# Altium PCB E17-03-VCU.PcbDoc
Units mm, origin at the board's own origin, x right, y up, seen from the top; angles counter-clockwise.
Board outline 53.5 x 98.5 mm, 2 copper layers (Top Layer, Bottom Layer), stack 1.671 mm thick; 47 components, 26 nets, 196 pads, 89 vias.
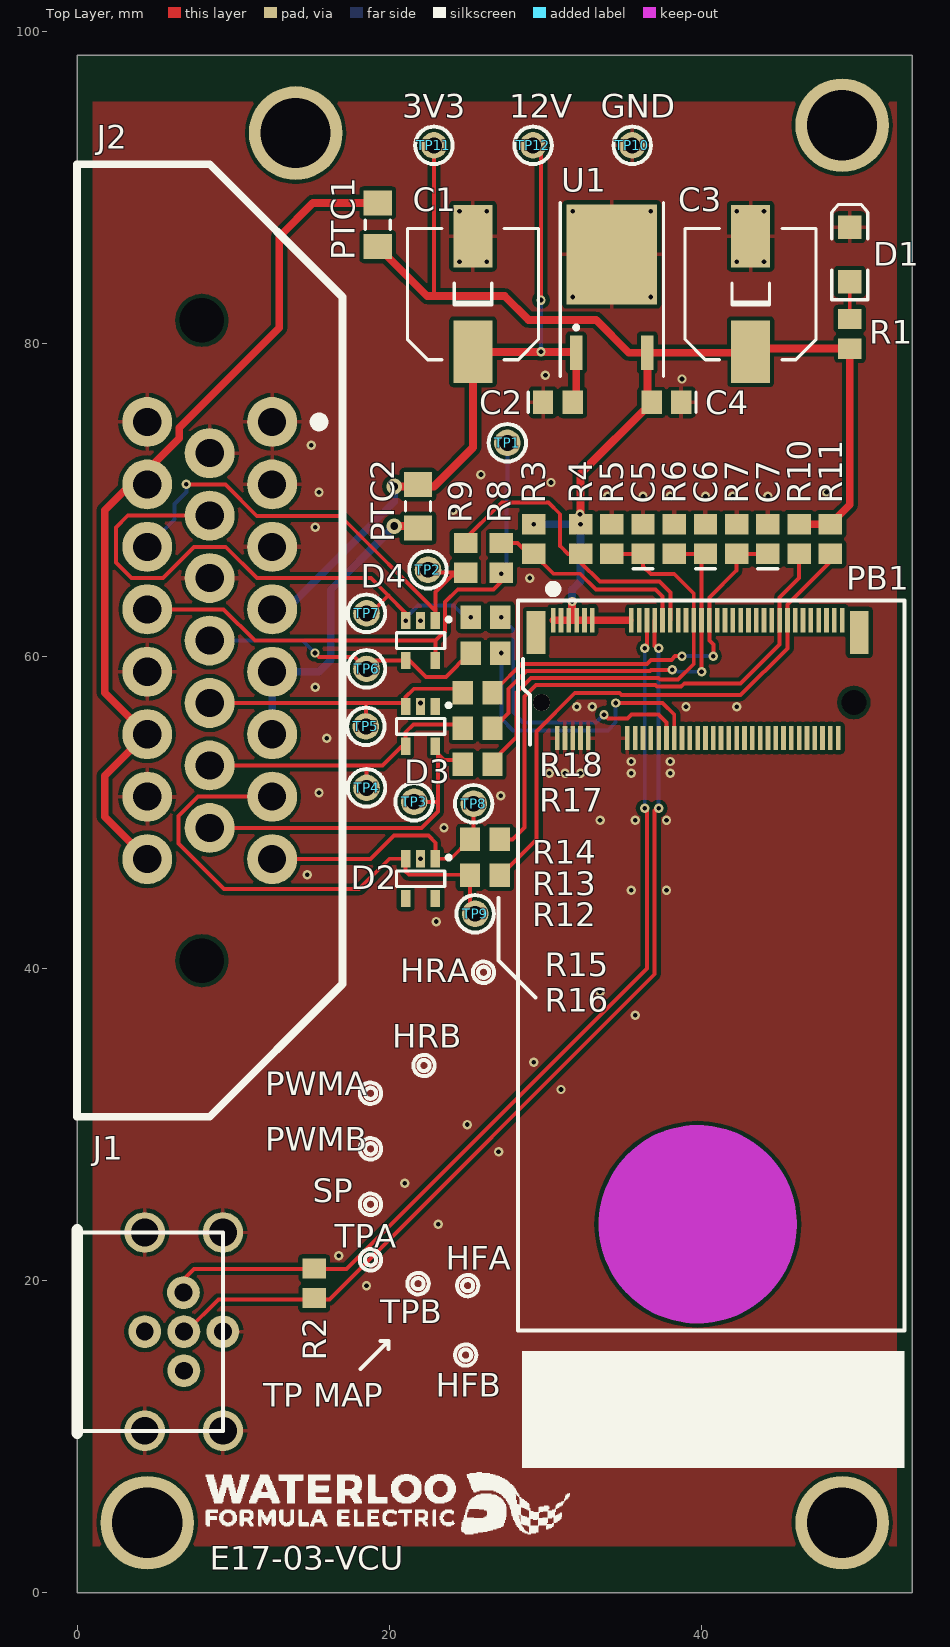
[diagram p0: Top Layer view]
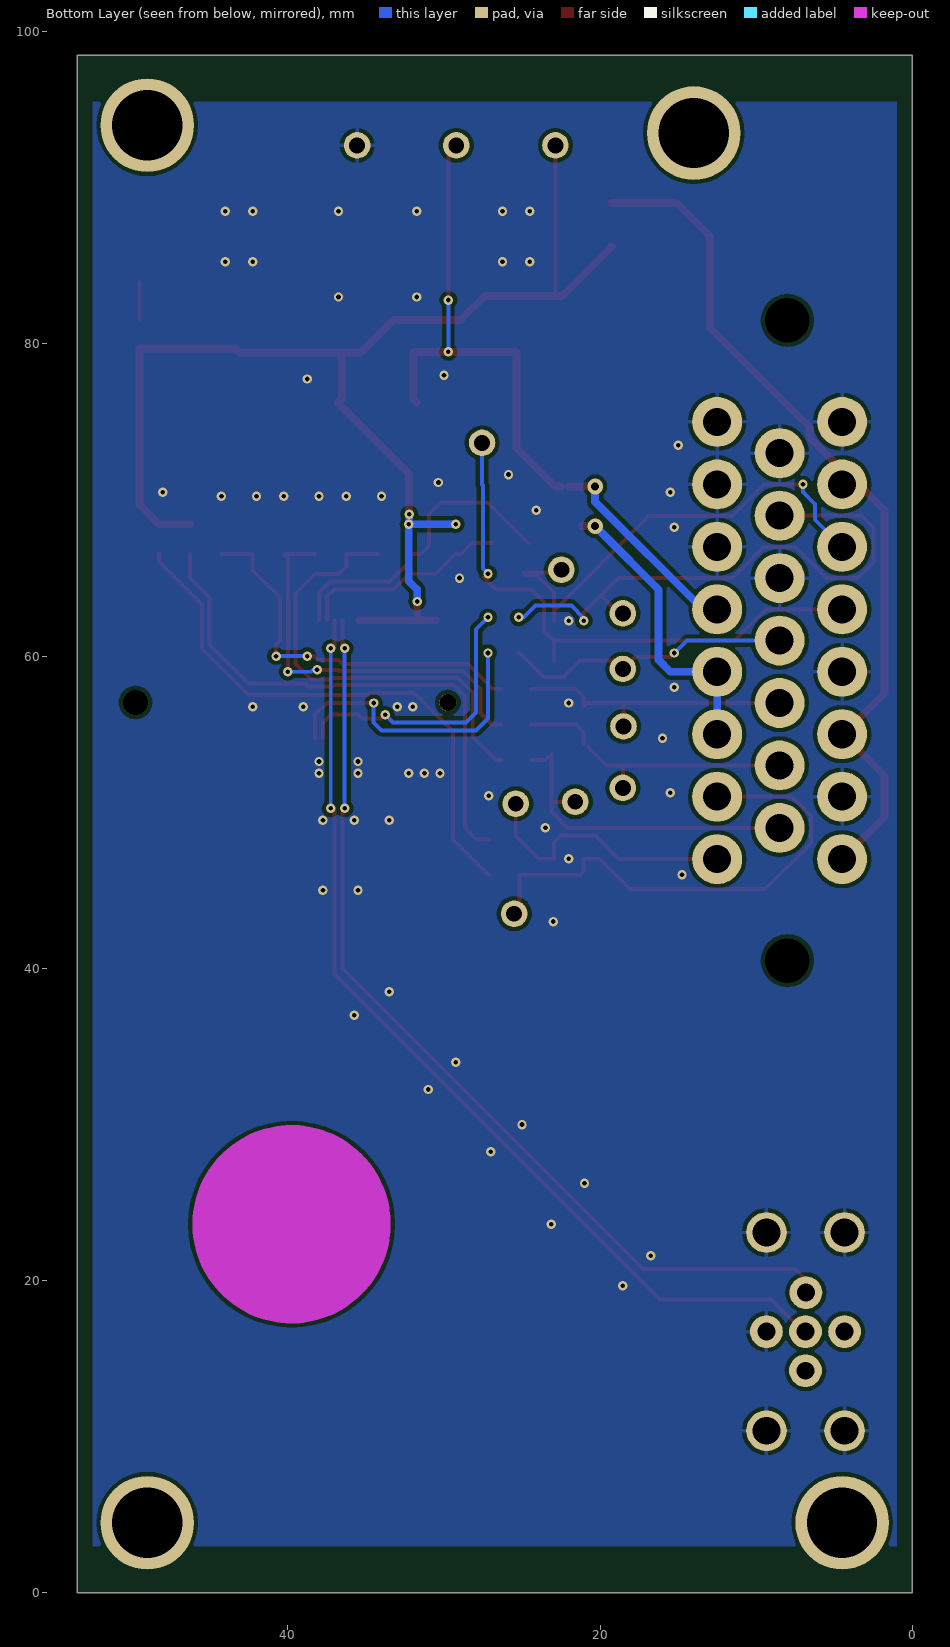
[diagram p1: Bottom Layer view, seen from below]
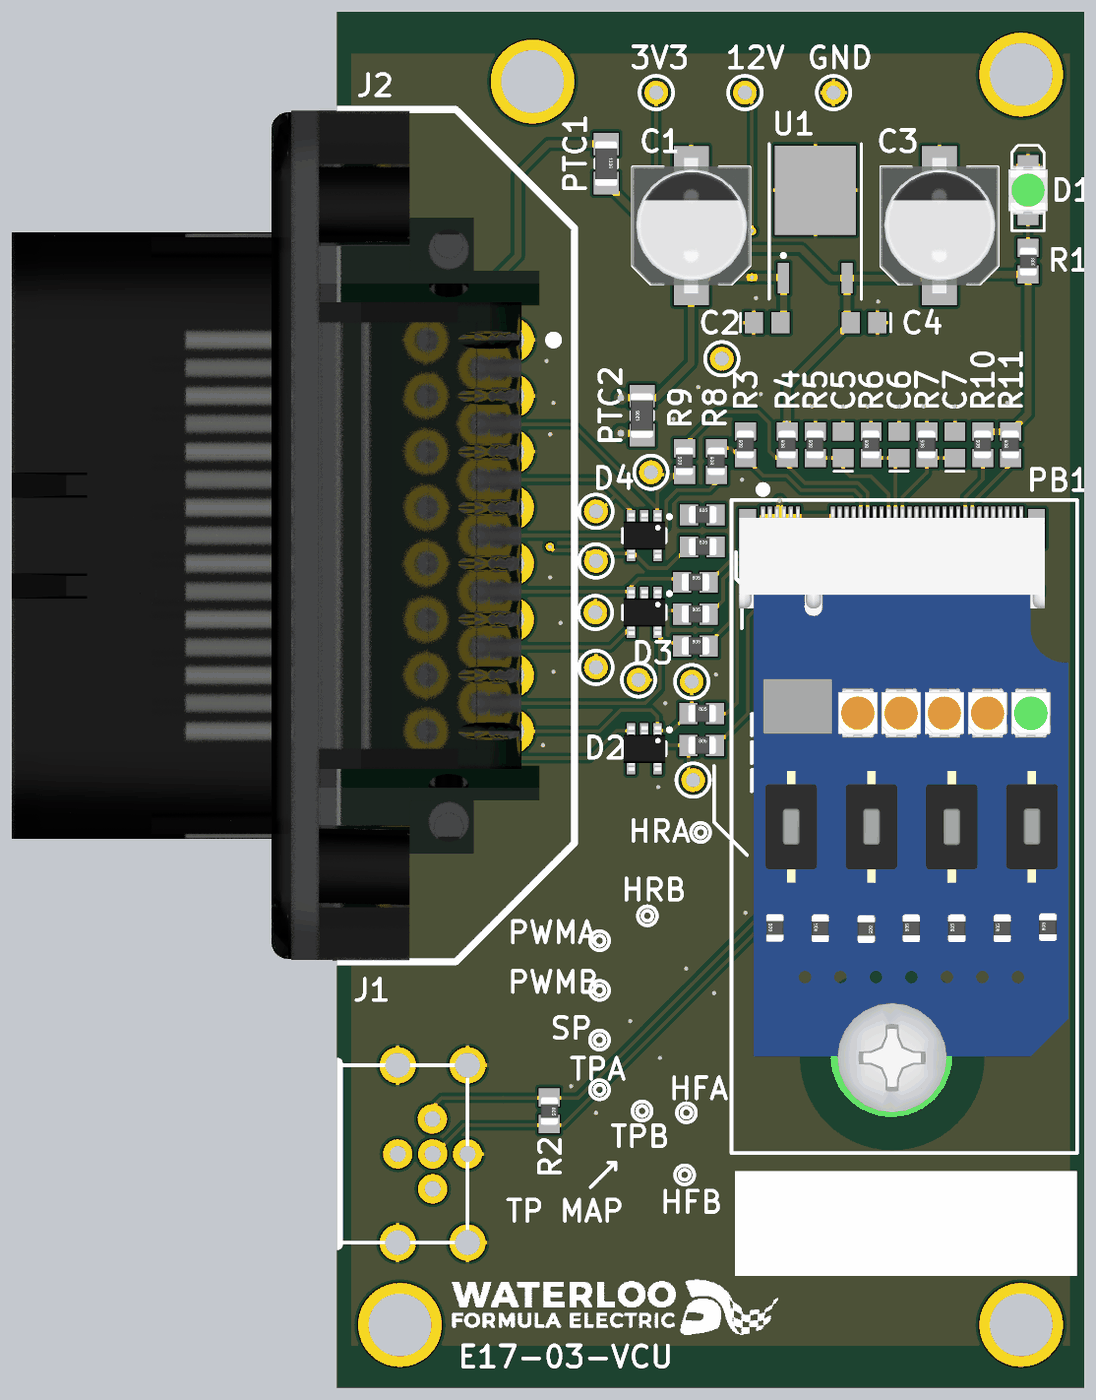
[diagram p2: 3D render of the assembled board from above, using the file's embedded part models]

## Layer stack, top to bottom
Top Solder: solder mask 0.0102, Solder Resist, Dk 3.5
Top Layer: signal copper 0.0356
Dielectric 1: dielectric 1.6, FR-4, Dk 4.8
Bottom Layer: signal copper 0.0356
Bottom Solder: solder mask 0.0102, Solder Resist, Dk 3.5

## Board outline
0,0 0,98.5 53.5,98.5 53.5,0

## Design rules (kind name [scope] priority, off if disabled: settings)
Clearance Clearance_1 [All vs InPolygon] p1: gap=0.256 ignorepadtopadclearanceinfootprint=FALSE except(0: Arc-Hole Track-Hole SMDPad-Hole THPad-Hole Via-Hole Fill-Hole Poly-Hole Region-Hole Text-Hole)
Clearance [All] p2: gap=0.2 ignorepadtopadclearanceinfootprint=TRUE except(0: Arc-Hole Track-Hole SMDPad-Hole THPad-Hole Via-Hole Fill-Hole Poly-Hole Region-Hole Text-Hole)
Height [All] p1 off: minheight=0 maxheight=25.4 prefheight=12.7
HoleSize [All] p1: absolutevalues=TRUE maxlimit=10 minlimit=0.25 maxpercent=80.000 minpercent=20.000
MinimumSolderMaskSliver [All] p1 off: minsoldermaskwidth=0.254
PlaneClearance PlaneClearance_1 [All] p1: clearance=0.2
PlaneClearance [All] p2: clearance=0.256
PlaneConnect [All] p1: planeconnectstyle=Direct reliefexpansion=0.508 reliefentries=4 reliefconductorwidth=0.254 reliefairgap=0.254
PolygonConnect [All vs IsVia] p1: connectstyle=Direct reliefconductorwidth=0.254 reliefentries=4 polygonreliefangle="90 Angle" airgapwidth=0.254
PolygonConnect PolygonConnect_1 [All] p2: thpad.connectstyle=Relief thpad.reliefconductorwidth=0.254 thpad.reliefentries=4 thpad.polygonreliefangle="90 Angle" thpad.airgapwidth=0.254 smdpad.connectstyle=Relief smdpad.reliefconductorwidth=0.254 smdpad.reliefentries=4 smdpad.polygonreliefangle="90 Angle" smdpad.airgapwidth=0.254 via.connectstyle=Direct via.reliefconductorwidth=0.254 via.reliefentries=4 via.polygonreliefangle="90 Angle" via.airgapwidth=0.254
RoutingVias [All] p1: holewidth=0.3 width=0.6 viastyle="Through Hole" minholewidth=0.25 minwidth=0.6 maxholewidth=1 maxwidth=1.27
SilkToSilkClearance [All] p1 off: silktosilkclearance=0.254
SilkToSolderMaskClearance [IsPad] p1 off: minsilkscreentomaskgap=0.1 clearancetoexposedcopper=TRUE
SolderMaskExpansion [All] p1: expansion=0.102
Width [All] p1: maxlimit=1 minlimit=0.254 preferedwidth=0.254 minimp=50.000000 maximp=50.000000 favimp=50.000000
23 further rules are at their usual default settings.

## Components (designator, comment, footprint, x,y, rotation, side; value= is the part's Value field where it differs from the comment)
C1 "UWT1E470MCL1GB" UWT1E470MCL1GB 25.36,83.185 r90 top value=100µF
C2 "Cap" C0805 30.8,76.25 r0 top value=10uF
C3 "UWT1E470MCL1GB" UWT1E470MCL1GB 43.14,83.185 r90 top value=100µF
C4 "Cap" C0805 37.75,76.25 r180 top value=10uF
C5 "Cap" C0805 36.25,67.5 r90 top value=100nF
C6 "Cap" C0805 40.25,67.5 r90 top value=100nF
C7 "Cap" C0805 44.25,67.5 r90 top value=100nF
D1 "OVS5MGBCR4" OVS5MGBCR4 49.49,85.725 r90 top
D2 "RCLAMP3354S.TCT" SOT95P280X145-5N 22,45.75 r270 top
D3 "RCLAMP3354S.TCT" SOT95P280X145-5N 22,55.5 r270 top
D4 "RCLAMP3354S.TCT" SOT95P280X145-5N 22,61 r270 top
J1 "CAN Connector (90)" "CAN Connector (90)" 6.843,16.739 r90 top
J2 "TE-776087-1" TE-776087-1 12.5,75 r270 top
PB1 "ProcBoardRev2" PROC_BOARD 30.5,44.8 r0 top
PTC1 "1206L075/16WR" 3216[1206] 19.264,87.63 r270 top value=1K
PTC2 "1206L075/16WR" 3216[1206] 21.844,69.596 r90 top value=1K
R1 "Res" 2012[0805] 49.49,80.645 r270 top value=1K
R2 "Res" 2012[0805] 15.189,19.837 r270 top value=120
R3 "Res" 2012[0805] 29.25,67.5 r90 top value=1M
R4 "Res" 2012[0805] 32.25,67.5 r90 top value=1M
R5 "Res" 2012[0805] 34.25,67.5 r90 top value=1M
R6 "Res" 2012[0805] 38.25,67.5 r90 top value=1M
R7 "Res" 2012[0805] 42.25,67.5 r90 top value=1M
R8 "Res" 2012[0805] 27.178,66.294 r90 top value=470
R9 "Res" 2012[0805] 24.892,66.294 r90 top value=470
R10 "Res" 2012[0805] 46.25,67.5 r90 top value=10K
R11 "Res" 2012[0805] 48.25,67.5 r90 top value=10K
R12 "Res" 2012[0805] 25.654,53.086 r0 top value=470
R13 "Res" 2012[0805] 25.654,55.372 r0 top value=470
R14 "Res" 2012[0805] 25.654,57.658 r0 top value=470
R15 "Res" 2012[0805] 26.122,48.26 r0 top value=470
R16 "Res" 2012[0805] 26.122,45.974 r0 top value=470
R17 "Res" 2012[0805] 26.162,60.198 r0 top value=100
R18 "Res" 2012[0805] 26.162,62.484 r0 top value=100
TP1 "Test Point" "TEST POINT 5000K" 27.559,73.66 r0 top
TP2 "Test Point" "TEST POINT 5000K" 22.479,65.532 r0 top
TP3 "Test Point" "TEST POINT 5000K" 21.59,50.673 r0 top
TP4 "Test Point" "TEST POINT 5000K" 18.542,51.562 r0 top
TP5 "Test Point" "TEST POINT 5000K" 18.5,55.5 r0 top
TP6 "Test Point" "TEST POINT 5000K" 18.542,59.182 r0 top
TP7 "Test Point" "TEST POINT 5000K" 18.542,62.738 r0 top
TP8 "Test Point" "TEST POINT 5000K" 25.4,50.546 r0 top
TP9 "Test Point" "TEST POINT 5000K" 25.5,43.5 r0 top
TP10 "Test Point" "TEST POINT 5000K" 35.56,92.71 r90 top
TP11 "Test Point" "TEST POINT 5000K" 22.86,92.71 r90 top
TP12 "Test Point" "TEST POINT 5000K" 29.21,92.71 r90 top
U1 "UA78M33CKVURG3" TO-252-3 34.25,88.925 r0 top

## Footprints (in the part's own frame and the unit in brackets; to place one, negate y for a bottom-side part, rotate by r counter-clockwise, add the part's x,y. Pads: shape width x height; smd on the part's side, far side on the other; paste and mask are expansions set on the pad)
2012[0805] [mm] "Chip Resistor; Body 2.0 x 1.3 mm (LxW typ)"
  rect 1.3x1.5 smd: 1(-0.95,0) 2(0.95,0)
  body extent -0.97,-0.61 1.03,0.64, height 0.77
3216[1206] [mm] "Chip Resistor; Body 3.2 x 1.6 mm (LxW typ)"
  rect 1.6x1.8 smd: 1(-1.4,0) 2(1.4,0)
  silkscreen extent -0.3,-0.8 0.3,0.8, body extent -1.6,-0.79 1.6,0.81, height 1
C0805 [mm] "Chip Capacitor; Body 2.0 x 1.2 mm (LxW typ)"
  rect 1.3x1.5 smd: 1(-0.95,0) 2(0.95,0)
  silkscreen extent -1.9,-0.65 -1.9,0.65
"CAN Connector (90)" [mm] "90 Degree Configuration"
  round 2.1 hole 1.14: 1(0,2.5) 2(-2.5,0) 3(0,-2.5) 4(2.5,0.025) 5(0,0)
  round 2.6 hole 1.78: 6(6.35,2.5) 7(6.35,-2.5) 8(-6.35,2.5) 9(-6.35,-2.5)
  silkscreen extent -6.5,-2.5 6.5,6.82, body extent -10.28,-7.25 10.28,21.25, height 18.55
OVS5MGBCR4 [mm] "SMT LED; 2 Flat Leads; GREEN"
  rect 1.5x1.5 smd: 1(-1.75,0) 2(1.75,0)
  silkscreen extent -2.9,-1.15 3.2,1.15, body extent -1.75,-1.4 1.75,1.4, height 1.6
PROC_BOARD [mm]
  rect 1.2x2.75 smd: 0(-1.1,16.725) 0(19.6,16.725)
  round 1.1 hole 1.1 unplated paste+0: 0(-0.75,12.225)
  round 0 hole 6.35 unplated: 0(9.258,-21.183)
  round 1.524 hole 1.6 unplated: 0(19.25,12.225)
  rect 0.3x1.55 smd: 1(0,17.5) 2(0.25,9.95) 3(0.5,17.5) 4(0.75,9.95) 5(1,17.5) 6(1.25,9.95) 7(1.5,17.5) 8(1.75,9.95) 9(2,17.5) 10(2.25,9.95) 11(2.5,17.5) 12(4.75,9.95) 13(5,17.5) 14(5.25,9.95) 15(5.5,17.5) 16(5.75,9.95) 17(6,17.5) 18(6.25,9.95) 19(6.5,17.5) 20(6.75,9.95) 21(7,17.5) 22(7.25,9.95) 23(7.5,17.5) 24(7.75,9.95) 25(8,17.5) 26(8.25,9.95) 27(8.5,17.5) 28(8.75,9.95) 29(9,17.5) 30(9.25,9.95) 31(9.5,17.5) 32(9.75,9.95) 33(10,17.5) 34(10.25,9.95) 35(10.5,17.5) 36(10.75,9.95) 37(11,17.5) 38(11.25,9.95) 39(11.5,17.5) 40(11.75,9.95) 41(12,17.5) 42(12.25,9.95) 43(12.5,17.5) 44(12.75,9.95) 45(13,17.5) 46(13.25,9.95) 47(13.5,17.5) 48(13.75,9.95) 49(14,17.5) 50(14.25,9.95) 51(14.5,17.5) 52(14.75,9.95) 53(15,17.5) 54(15.25,9.95) 55(15.5,17.5) 56(15.75,9.95) 57(16,17.5) 58(16.25,9.95) 59(16.5,17.5) 60(16.75,9.95) 61(17,17.5) 62(17.25,9.95) 63(17.5,17.5) 64(17.75,9.95) 65(18,17.5) 66(18.25,9.95) 67(18.5,17.5)
  Keep-Out Layer circle w6.35: c9.258,-21.183 r3.175
  silkscreen extent -2.25,-28 22.5,19.75, body extent -1.7,-25.44 21.89,18.08, height 6.34
SOT95P280X145-5N [mm] "SOT23, 5-Leads, Body 2.95x2.80mm, Pitch 0.95mm, IPC Medium Density"
  rect 1.1x0.6 smd: 1(-1.275,0.95) 2(-1.275,0) 3(-1.275,-0.95) 4(1.275,-0.95) 5(1.275,0.95)
  silkscreen extent -1.47,-1.55 0.5,1.93, body extent -1.6,-1.48 1.6,1.52, height 0.91
TE-776087-1 [mm] "CONN HDR RTANG 23POS W/GASKT TIN"
  round 0 hole 2.85 unplated: 0(-6.5,-4.5) 0(34.5,-4.5)
  round 3.2 hole 1.8: 1(0,0) 2(4,0) 3(8,0) 4(12,0) 5(16,0) 6(20,0) 7(24,0) 8(28,0) 9(2,-4) 10(6,-4) 11(10,-4) 12(14,-4) 13(18,-4) 14(22,-4) 15(26,-4) 16(0,-8) 17(4,-8) 18(8,-8) 19(12,-8) 20(16,-8) 21(20,-8) 22(24,-8) 23(28,-8)
  silkscreen extent -16.5,-12.5 44.5,4.5, body extent -16.4,-35.8 44.4,2, height 27.77
"TEST POINT 5000K" [mm] "Test Point, 5000 Keystone Series, 0.040\" Hole"
  round 1.7 hole 1.02 mask+0.1: 1(0,0)
  silkscreen extent -1.2,-1.2 1.2,1.2
TO-252-3 [mm] "D-PAK/TO-252-3; 3 Leads"
  rect 0.8x2.2 smd: 1(-2.28,-9.5) 3(2.28,-9.5)
  rect 5.8x6.4 smd: 2(0,-3.2)
  silkscreen extent -3.3,-11 3.3,0.13
UWT1E470MCL1GB [mm] "CAP ALUM 47UF 25V 20% SMD"
  rect 4x2.5 smd: 1(-3.7,0) 2(3.7,0)
  silkscreen extent -4.2,-4.2 4.2,4.2, body extent -4.85,-4.25 4.85,4.25, height 10.5

## Part data
C1 C3: "CAP ALUM 47UF 25V 20% SMD", LatestRevisionDate=17-Jul-2002, LatestRevisionNote="Re-released for DXP Platform.", PackageDescription="Polarized Capacitor; 2 Leads", PackageReference=POLAR0.8, Published=8-Jun-2000, Publisher="Altium Limited"
C2 C4 C5 C6 C7: "Capacitor", LatestRevisionDate=17-Jul-2002, LatestRevisionNote="Re-released for DXP Platform.", PackageReference=C1206, Published=8-Jun-2000, Publisher="Altium Limited"
D1: "Typical GREEN LED", Colour=GREEN, PackageDocument=Feb-2002, Supplier Part Number 1=365-1545-1-ND, LatestRevisionDate=17-Jul-2002, LatestRevisionNote="Re-released for DXP Platform.", PackageReference=3.2X1.6X1.1, Published=8-Jun-2000, Publisher="Altium Limited", Supplier 1=Digi-Key
D2 D3 D4: Supplier Part Number 1=RCLAMP3354STCTCT-ND, Supplier 1=Digi-Key
J2: "CONN HDR RTANG 23POS W/GASKT TIN", Supplier Part Number 1=A107007-ND, Supplier 1=Digi-Key
PB1: "Processor board that carries the STM32F072RB"
PTC1 PTC2: library part Res, "Surface Mount Resistor", LatestRevisionDate=17-Jul-2002, LatestRevisionNote="Re-released for DXP Platform.", PackageReference=AXIAL-0.5, Published=8-Jun-2000, Publisher="Altium Limited"
R1 R2 R3 R4 R5 R6 R7 R8 R9 R10 R11 R12 R13 R14 R15 R16 R17 R18: "Surface Mount Resistor", LatestRevisionDate=17-Jul-2002, LatestRevisionNote="Re-released for DXP Platform.", PackageReference=AXIAL-0.5, Published=8-Jun-2000, Publisher="Altium Limited"
TP1 TP2 TP3 TP4 TP5 TP6 TP7 TP8 TP9 TP10 TP11 TP12: "5000-5004, 5015-5019 Keystone Electronics"
U1: "3.3V Regulator", Supplier Part Number 1=296-21208-1-ND, Supplier 1=Digi-Key
J1: Supplier 1=Mouser

## Free pads (board coordinates)
  round 6 hole 4.5 unplated: 1(4.5,4.5) 1(14,93.5) 1(49,4.5) 1(49,94)

## Via types
v1: diameter 0.6, hole 0.3, Top Layer to Bottom Layer, tented both sides, 79 vias
v2: diameter 0.6, hole 0.3, Top Layer to Bottom Layer, 8 vias
v3: diameter 1, hole 0.5, Top Layer to Bottom Layer, tented both sides, 2 vias

## Nets (pads, with @x,y where several pads share a name; then routed paths per layer and width w, separated by ;. In a path a pad name is that pad's centre, name@x,y a point inside that pad or via, vN(x,y) a via of type N, cw(c..) or ccw(c..) an arc to the next point about the centre after c; other vN are vias at no path point)
+12: C1.1 C2.2 J2.4 PTC2.2 TP12.1 U1.1 | length 46.6
  Top Layer w0.254: TP12.1 29.718,92.202 v2(29.718,82.804)
  Top Layer w0.5: v3(20.32,70.866) PTC2.2@21.974,70.866 ; PTC2.2@22.482,70.866 22.866,70.866 25.36,73.36 C1.1 v2(29.718,79.485) 31.91,79.485 U1.1 31.97,76.47 C2.2
  Bottom Layer w0.254: v2(29.718,79.485) v2(29.718,82.804)
  Bottom Layer w0.5: J2.4@12.5,63.432 J2.4 13.43,63 20.32,69.89 20.32,70.358
CAN_H: J1.4 PB1.17 R2.1 | length 61.2
  Top Layer w0.254: J1.4@6.794,19.266 6.794,20.044 7.5,20.75 17.25,20.75 36.5,40 36.5,50.111 v1(36.361,50.25) ; v1(36.361,60.5) 36.5,60.639 PB1.17
  Bottom Layer w0.254: v1(36.361,50.25) v1(36.361,60.5)
CAN_L: J1.5 PB1.19 R2.2 | length 62.7
  Top Layer w0.254: J1.5@6.794,16.764 7.014,16.764 9.05,18.8 16.161,18.8 37,39.639 37,50.111 37.139,50.25 v1(37.25,50.25) ; PB1.19 37,60.639 37.139,60.5 v1(37.25,60.5)
  Bottom Layer w0.254: v1(37.25,50.25) v1(37.25,60.5)
GND: C1.2 C2.1 C3.2 C4.1 C5.2 C6.2 C7.2 D1.2 D2.2 D3.2 D4.2 J1.3 J1.6 J1.7 J1.8 J1.9 J2.1 J2.2 J2.3 J2.9 J2.11 J2.16 J2.20 J2.22 PB1.2 PB1.4 PB1.6 PB1.8 PB1.10 PB1.12 R5.2 R6.2 R7.2 TP10.1 U1.2
  other v1: 18.542,19.685 16.764,21.59 23.127,23.615 21,26.25 27,28.25 25,30 31,32.25 29.25,34 35.75,37 33.5,38.5 23,43 35.5,45 37.75,45 14.75,46 22,47.025 23.5,49 33.5,49.5 35.75,49.5 37.75,49.5 27.138,51.054 15.5,51.25 30.25,52.5 31.25,52.5 32.25,52.5 35.5,52.5 38,52.5 35.5,53.25 38,53.25 16,54.75 32,56.75 33,56.75 39,56.75 42.25,56.75 22,57 15.25,58 22,62.275 29,65 15.25,68.25 24.09,69.342 34,70.25 36.25,70.25 38,70.25 40.25,70.25 42,70.25 44.25,70.25 15.5,70.5 48,70.5 30.353,71.12 25.868,71.628 15,73.5 38.75,77.75 30,78 31.75,83 36.75,83 24.5,85.25 26.25,85.25 42.25,85.25 44,85.25 24.5,88.5 26.25,88.5 31.75,88.5 36.75,88.5 42.25,88.5 44,88.5
HALL_FRONT_A: D2.1 J2.8 R15.1 TP8.1 | length 17.4
  Top Layer w0.254: J2.8 18.806,47 20.306,48.5 22.5,48.5 22.95,48.05 D2.1 23.937,47.025 R15.1 25.4,48.488 TP8.1
HALL_FRONT_B: D2.3 J2.7 R16.1 TP9.1 | length 32.9
  Top Layer w0.254: J2.7@12.808,51.308 J2.7 7.75,51 6.5,49.75 6.5,48 9.427,45.073 18.073,45.073 20.025,47.025 D2.3 21.05,46.2 21.25,46 25.146,46 R16.1 25.172,43.828 TP9.1
HALL_REAR_A: D4.5 J2.19 R8.1 TP1.1 | length 36.9
  Top Layer w0.254: J2.19 9.39,63 11.39,61 22.95,61 ; D4.5 22.95,61 ; v2(27.178,65.278) 27.178,65.05 27.458,65.05 26.67,64.262 24.384,64.262 23.577,63.455 23.577,61.59 23.385,61.398 23.348,61.398 22.95,61
  Bottom Layer w0.254: v2(27.178,65.278) 27.5,65.6 27.5,70.934 27.559,70.993 TP1.1
HALL_REAR_B: D4.1 J2.18 R9.1 TP2.1 | length 31.5
  Top Layer w0.254: J2.18 J2.18@4.75,67.25 ; v1(7,71) 9.5,71 11.539,68.961 16.891,68.961 22.95,62.902 ; TP2.1 22.667,65.344 R9.1@24.598,65.344 ; D4.1 22.95,62.902 ; R9.1 R9.1@24.598,65.344 ; 22.95,62.902 22.95,64.098 24.029,65.177 24.765,65.177 R9.1@24.598,65.344
  Bottom Layer w0.254: J2.18 6.25,68.75 6.25,69.75 7,70.5 v1(7,71)
NetC5_1: C5.1 PB1.29 R5.1 R12.2 | length 28.8
  Top Layer w0.254: R12.2@26.31,53.34 26.67,53.34 28.154,54.824 28.154,57.658 29.088,58.592 37.252,58.592 37.346,58.498 38.498,58.498 39.5,59.5 PB1.29 39.5,64 38.25,65.25 36.75,65.25 36.25,65.75 C5.1 R5.1
NetC6_1: C6.1 PB1.31 R6.1 R13.2 | length 25.8
  Top Layer w0.254: R13.2@26.31,55.626 26.924,55.626 27.646,56.348 27.646,57.912 28.78,59.046 36.688,59.046 36.767,59.125 v1(38.125,59.125) ; R6.1 C6.1 40,66.3 PB1.31 v1(40,59)
  Bottom Layer w0.254: v1(38.125,59.125) 38.375,59.125 38.5,59 v1(40,59)
NetC7_1: C7.1 PB1.33 R7.1 R14.2 | length 24.7
  Top Layer w0.254: R14.2@26.31,57.912 26.884,57.912 28.472,59.5 36.5,59.5 36.752,59.752 38.065,59.752 38.313,60 v1(38.75,60) ; v1(40.75,60) 40.75,60.75 40.5,61 PB1.33 40.5,63.75 42.25,65.5 R7.1 C7.1
  Bottom Layer w0.254: v1(38.75,60) v1(40.75,60)
NetD1_1: D1.1 R1.1 | length 2.4
  Top Layer w0.254: R1.1 D1.1
NetJ2_5: J2.5 J2.6 PTC2.1 | length 19.2
  Top Layer w0.5: v3(20.32,68.326) PTC2.1@21.166,68.326
  Bottom Layer w0.5: J2.6 J2.5 15.5,59 16.25,59.75 16.25,64.25 19.818,67.818 19.812,67.818 v3(20.32,68.326)
NetJ2_17: J2.17 J2.21 J2.23 PTC1.1 | length 55.7
  Top Layer w0.5: J2.23 1.778,49.722 1.778,52.342 4.436,55 1.778,57.658 1.778,69.342 3.436,71 J2.17 4.5,71.899 6.55,73.949 6.55,74.622 12.954,81.026 12.954,86.868 15.116,89.03 PTC1.1
NetPB1_21: PB1.21 R3.1 R8.2 | length 13.5
  Top Layer w0.254: R8.2@26.884,67.244 R8.2 28.22,67.244 28.914,66.55 R3.1 30.522,65.278 32.218,65.278 33.234,64.262 37.044,64.262 37.5,63.806 PB1.21
NetPB1_23: PB1.23 R4.1 R9.2 | length 20.2
  Top Layer w0.254: R9.2@24.598,67.244 27.204,69.85 30.186,69.85 30.948,69.088 30.948,67.056 31.454,66.55 R4.1 32.25,66.008 33.488,64.77 37.298,64.77 38,64.068 PB1.23
NetPB1_51: PB1.51 R10.1 R15.2 | length 34.4
  Top Layer w0.254: R15.2 27.9,48.26 28.662,49.022 28.662,57.404 29.396,58.138 37.064,58.138 37.158,58.044 38.686,58.044 38.892,58.25 42.5,58.25 45,60.75 PB1.51 45,63.75 46.25,65 R10.1
NetPB1_53: PB1.53 R11.1 R16.2 | length 35.8
  Top Layer w0.254: R16.2 27.148,45.974 29.424,48.25 29.424,55.174 31.877,57.627 34.76,57.627 34.887,57.5 42.5,57.5 45.5,60.5 PB1.53 45.5,63.32 48.25,66.07 R11.1
PWM_A_P: PB1.22 R18.2 | length 18.1
  Top Layer w0.254: v1(33.75,56.25) 34,56 35.25,56 35.5,56.25 37.25,56.25 37.75,55.75 PB1.22
  Bottom Layer w0.254: v2(27.178,62.484) 27.94,61.722 27.94,56.388 28.578,55.75 33.25,55.75 v1(33.75,56.25)
PWM_A_P_NAKED: D4.3 J2.10 R18.1 TP7.1 | length 37.5
  Top Layer w0.254: J2.10 3.25,69 2.5,68.25 2.5,66 3.5,65 5.5,65 7.5,67 9.525,67 11.525,65 18.82,65 19.935,63.885 ; TP7.1 18.788,62.738 19.935,63.885 ; v2(21.05,62.275) 21.05,62.77 19.935,63.885
  Bottom Layer w0.254: v2(21.05,62.275) 21.05,62.452 21.844,63.246 24.13,63.246 24.892,62.484 v2(25.212,62.484)
PWM_B_P: PB1.24 R17.2 | length 18.8
  Top Layer w0.254: v1(34.5,57) 37.5,57 38.25,56.25 PB1.24
  Bottom Layer w0.254: v2(27.178,60.198) 27.178,56.007 27.935,55.25 34,55.25 34.5,55.75 v1(34.5,57)
PWM_B_P_NAKED: D4.4 J2.12 R17.1 TP6.1 | length 18.8
  Top Layer w0.254: v2(15.24,60.198) 15.494,59.944 17.78,59.944 TP6.1 19.085,59.725 D4.4 21.301,59.725 22.352,58.674 23.622,58.674 25.146,60.198 R17.1
  Bottom Layer w0.254: J2.12 14.438,61 v2(15.24,60.198)
STEER_POS: D3.3 J2.13 R14.1 TP5.1 | length 18.3
  Top Layer w0.254: J2.13 18.5,57 ; TP5.1 18.5,57 ; R14.1@24.41,57.912 21.59,57.912 21.05,57.372 D3.3 20.825,57 18.5,57
THROTT_POS_A: D3.4 J2.14 R13.1 TP4.1 | length 18.3
  Top Layer w0.254: J2.14@8.821,52.679 9.142,53 18.542,53 ; TP4.1 18.542,53 ; D3.4@20.763,54.188 19.575,53 18.542,53 ; D3.4@21.05,54.351 21.05,55.126 21.55,55.626 R13.1@24.41,55.626
THROTT_POS_B: D3.5 J2.15 R12.1 TP3.1 | length 21.7
  Top Layer w0.254: J2.15 22.076,49 23.114,50.038 23.114,50.673 ; TP3.1 23.114,50.673 ; R12.1@24.41,53.34 23.511,53.34 23.114,53.737 23.114,50.673
VCC: C3.1 C4.2 PB1.1 PB1.3 PB1.5 PB1.7 PB1.9 PB1.11 PB1.13 PTC1.2 R1.2 R3.2 R4.2 R10.2 R11.2 TP11.1 U1.3 | length 84.2
  Top Layer w0.254: 22.86,83.058 TP11.1
  Top Layer w0.5: PTC1.2 22.436,83.058 22.86,83.058 27.392,83.058 28.916,81.534 33.234,81.534 35.343,79.425 U1.3 ; v1(29.25,68.45) R3.2@29.554,68.45 ; PB1.1 PB1.3 PB1.5 ; v1(31.71,63.5) 31.71,62.51 PB1.5 ; R4.2@32.25,69.088 32.25,71.7 C4.2 36.53,76.52 U1.3 ; PB1.13@35.4,62.3 PB1.11 PB1.9 PB1.7 PB1.5 ; R10.2 R11.2 49.49,69.69 R1.2 43.35,79.695 C3.1 43.08,79.425 U1.3
  Bottom Layer w0.5: v1(29.25,68.45) v1(32.25,68.45) ; v1(31.71,63.5) 31.71,64.262 32.25,64.802 v1(32.25,68.45) ; v1(32.218,69.088) 32.218,68.482 v1(32.25,68.45)
pads on no net: D2.4 D2.5 D3.1 J1.1 J1.2 J2.0 PB1.0 PB1.14 PB1.15 PB1.16 PB1.18 PB1.20 PB1.25 PB1.26 PB1.27 PB1.28 PB1.30 PB1.32 PB1.34 PB1.35 PB1.36 PB1.37 PB1.38 PB1.39 PB1.40 PB1.41 PB1.42 PB1.43 PB1.44 PB1.45 PB1.46 PB1.47 PB1.48 PB1.49 PB1.50 PB1.52 PB1.54 PB1.55 PB1.56 PB1.57 PB1.58 PB1.59 PB1.60 PB1.61 PB1.62 PB1.63 PB1.64 PB1.65 PB1.66 PB1.67

## Polygon pours and split planes (outlines as drawn)
GND on Bottom Layer "bottom_plane" (solid, pour order 0): 1,95.5 52.5,95.5 52.5,3 1,3
GND on Top Layer "top_plane" (solid, pour order 2): 1,95.5 52.5,95.5 52.5,3 1,3

## Silkscreen, mask and mechanical layers (free items; w line width, h text height)
Top Overlay:
  drawing of 1146 lines, arcs and shapes, not listed
  text "3V3" at 20.828,94.488 h1.52
  text "12V" at 27.686,94.488 h1.52
  text "GND" at 33.528,94.488 h1.52
  text "HRA" at 20.701,39.116 h1.52
  text "HRB" at 20.193,34.925 h1.52
  text "PWMA" at 12.065,31.877 h1.52
  text "PWMB" at 12.065,28.321 h1.52
  text "SP" at 15.113,25.019 h1.52
  text "TPA" at 16.51,22.098 h1.52
  text "HFA" at 23.622,20.701 h1.52
  text "TPB" at 19.431,17.272 h1.52
  text "HFB" at 22.987,12.573 h1.52
  text "TP MAP" at 11.938,11.938 h1.52
  text "E17-03-VCU" at 8.5,1.5 h1.52
Mechanical 2:
  lines w0.256: 2.5,98.5 53.5,98.5 ; 51,0 0,0 ; 0,0 53.5,0 ; 0,0 0,98.5 ; 0,0 0,98.5 ; 0,98.5 53.5,98.5 ; 53.5,0 53.5,98.5 ; 53.5,0 53.5,98.5
Mechanical 13:
  text "Box P/N: EXN-23356-GD . Board outline made to fit. / 2X EXN-23370-MBK brackets for mounting" at -0.254,101.246 h1.52